# Altium PCB PCB_W-F-FC-HX2X_with_3D_Plastic.PcbDoc
Units mm, origin at the board's own origin, x right, y up, seen from the top; angles counter-clockwise.
Board outline 48.25 x 57.25 mm, 2 copper layers (Top Layer, Bottom Layer); 22 components, 14 nets, 61 pads, 0 vias.
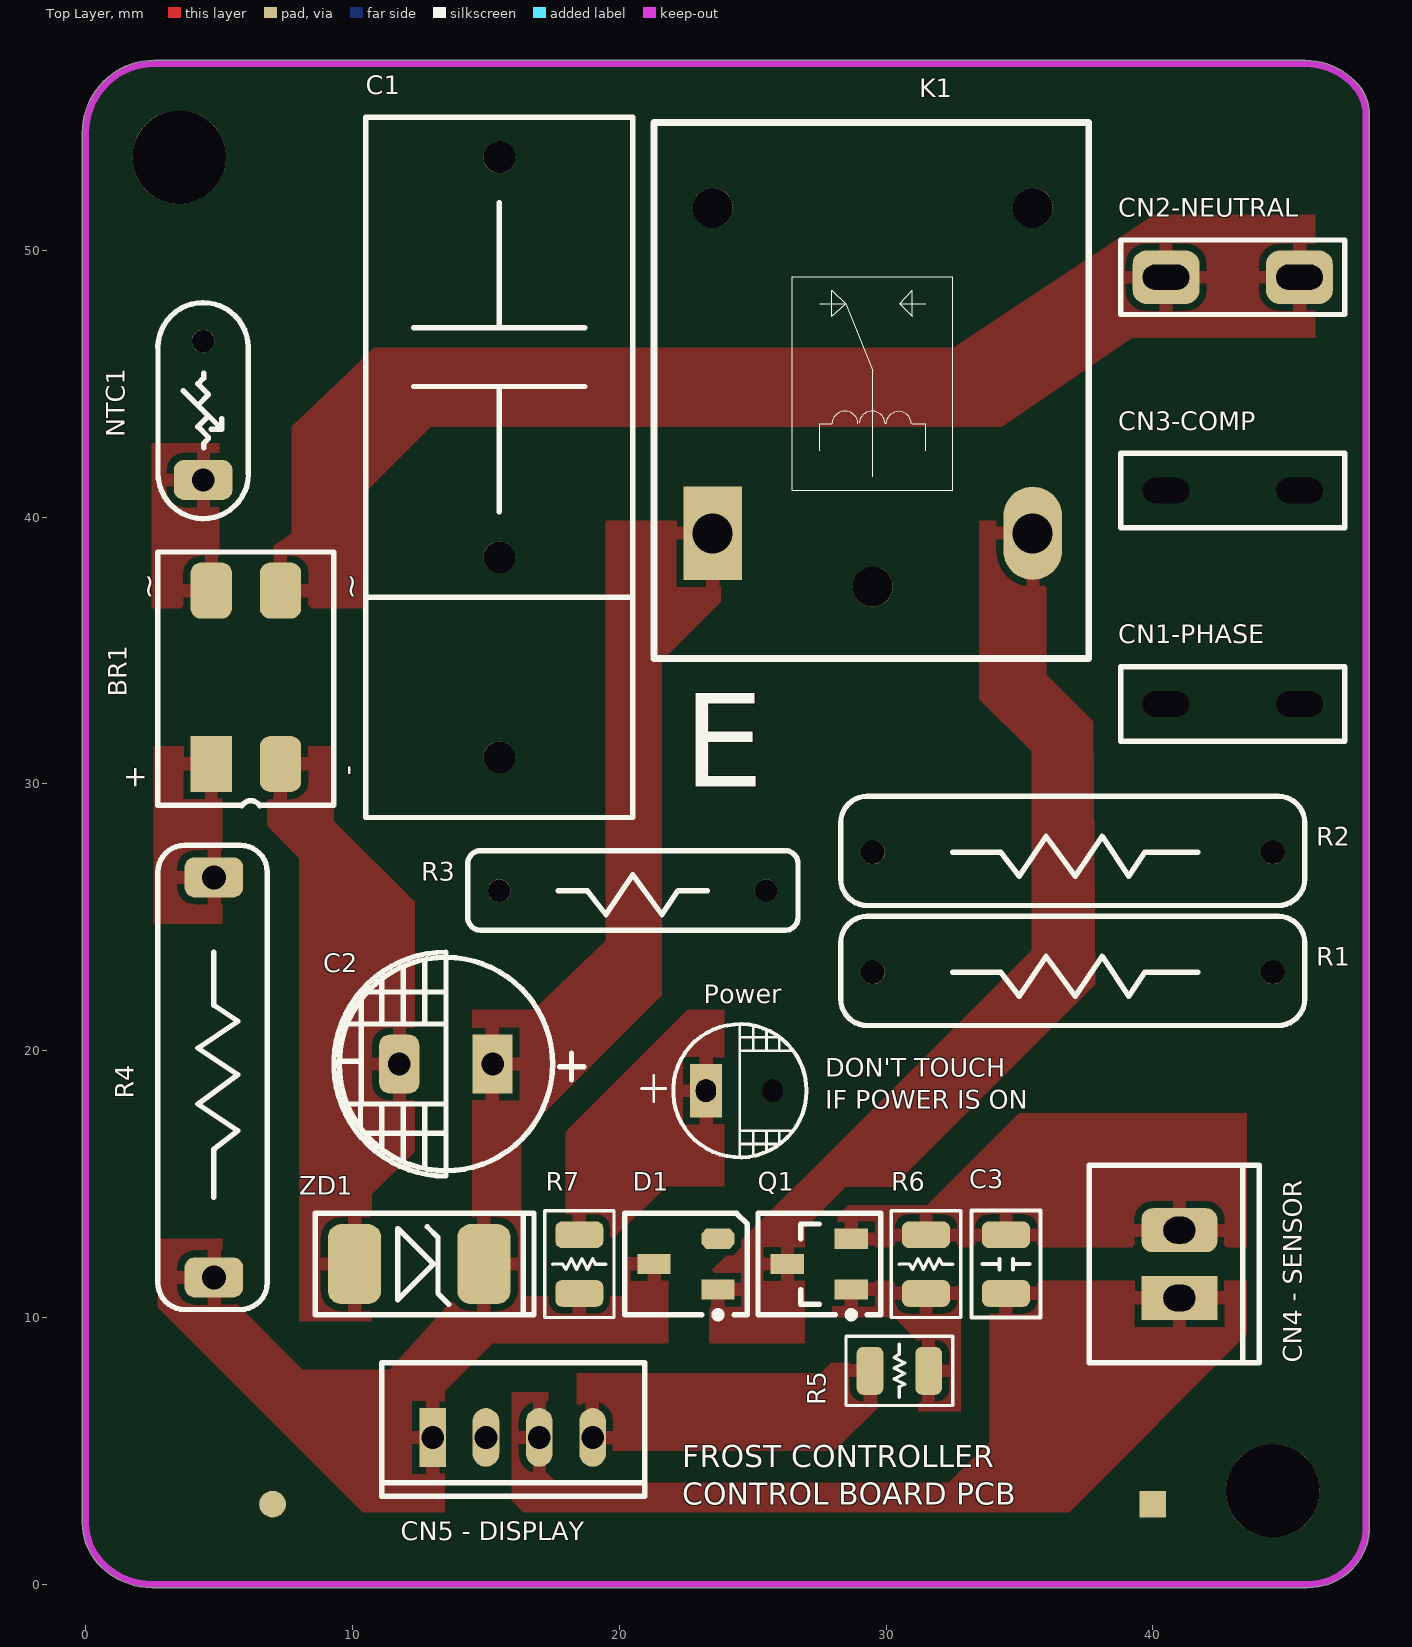
[diagram p0: Top Layer view]
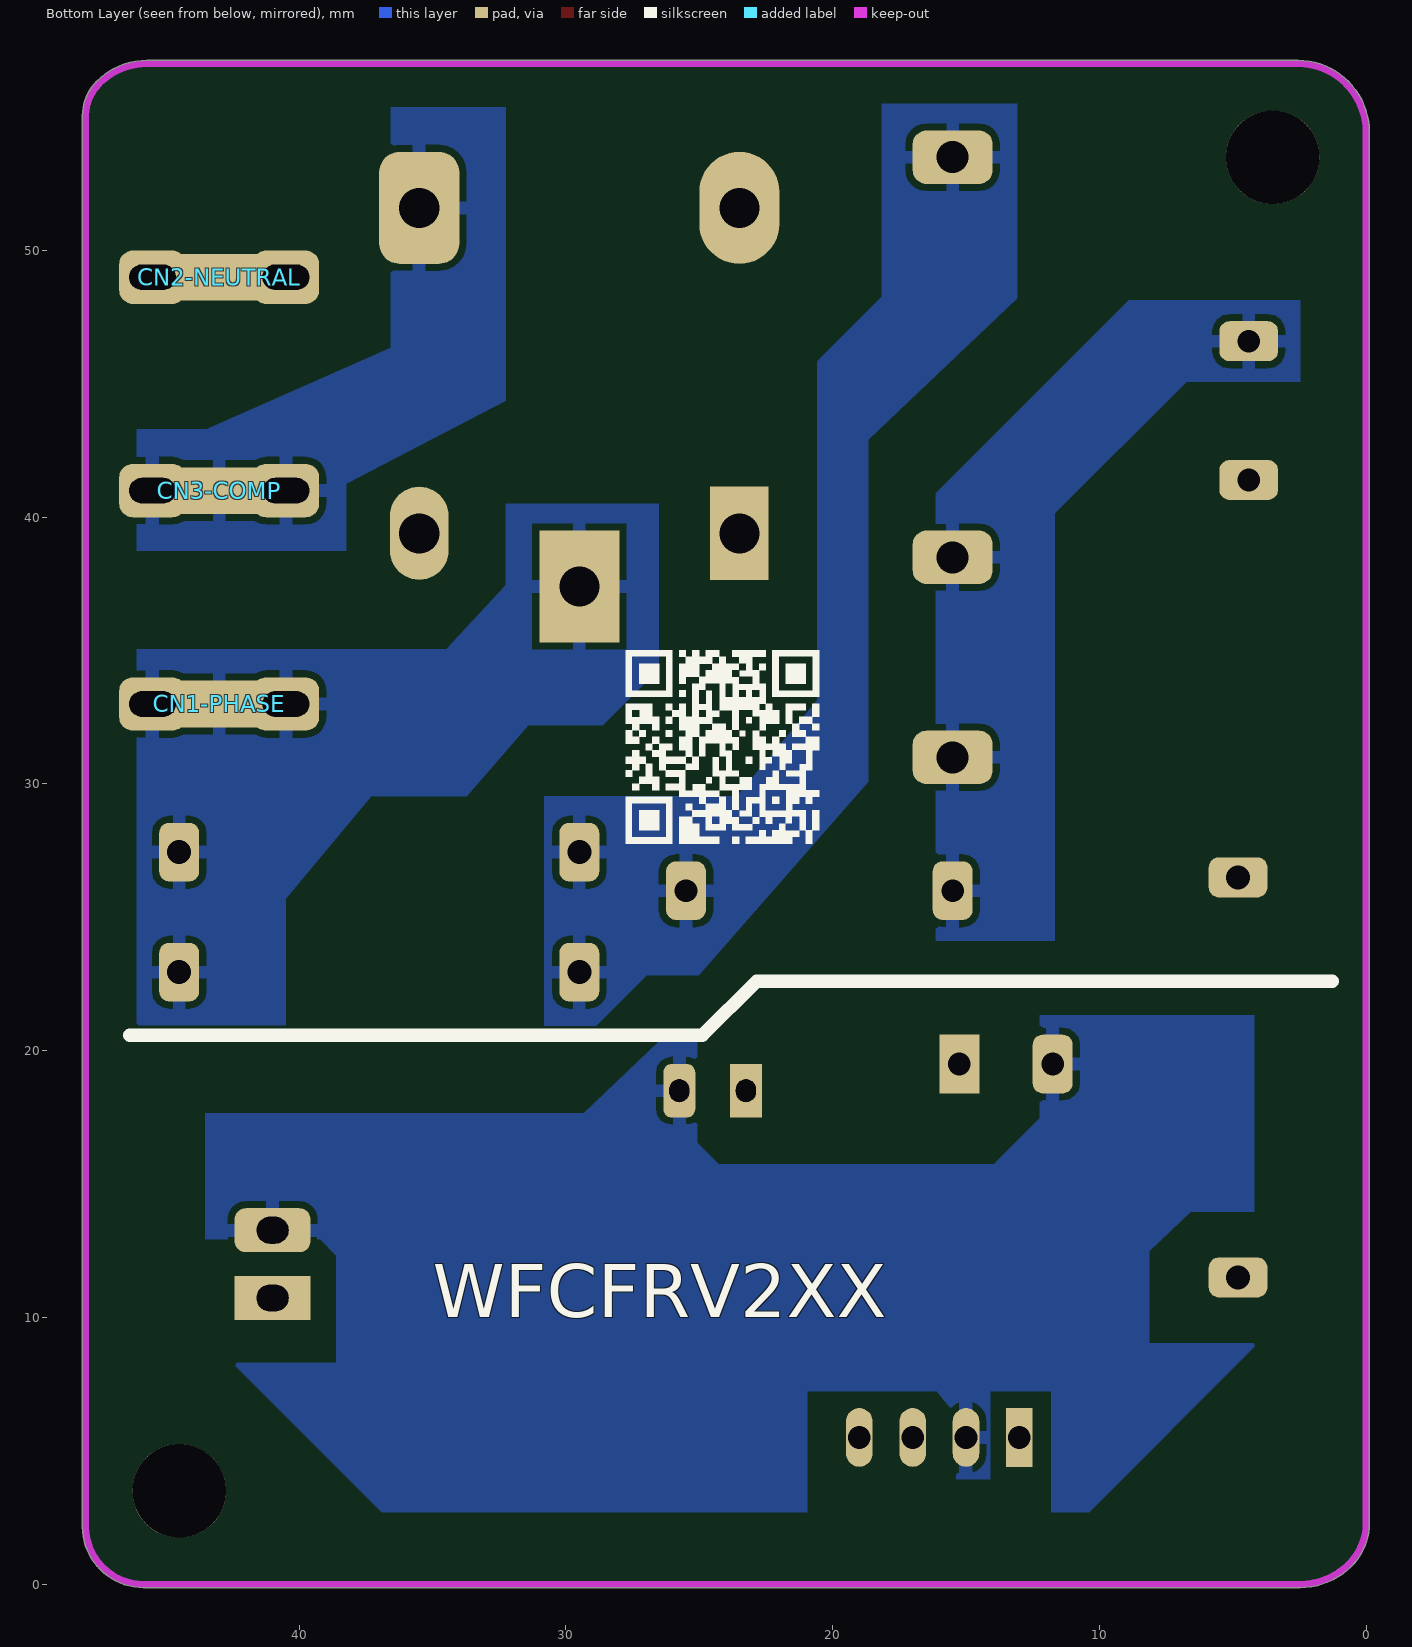
[diagram p1: Bottom Layer view, seen from below]
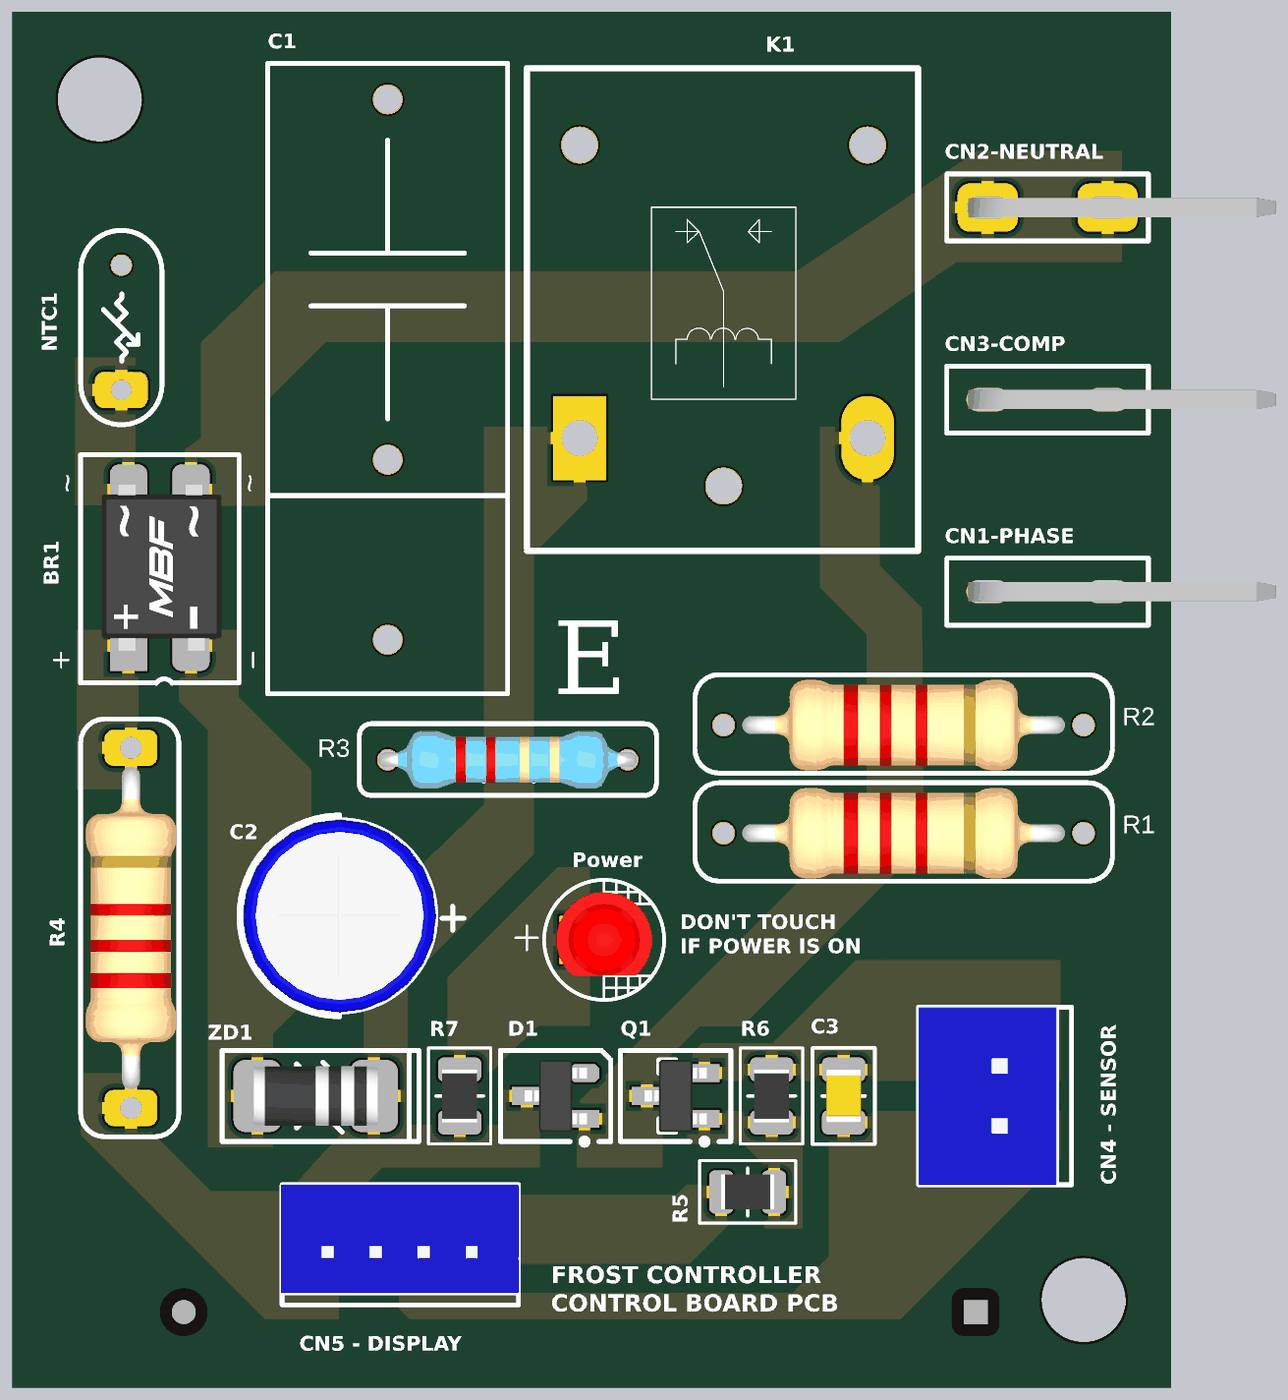
[diagram p2: 3D render of the assembled board from above, using the file's embedded part models]

## Layer stack, top to bottom
Top Solder: solder mask 0.0102, Solder Resist, Dk 3.5
Top Layer: signal copper 0.0356
Dielectric 1: dielectric 0.32, FR-4, Dk 4.8
Bottom Layer: signal copper 0.0356
Bottom Solder: solder mask 0.0102, Solder Resist, Dk 3.5

## Board outline
0.545,0.672 cw(c2.168,2.295) -0.127,2.295 -0.127,54.421 cw(c2.602,54.421) 0.672,56.351 cw(c2.546,54.477) 2.546,57.127 45.714,57.127 cw(c45.714,54.477) 47.588,56.351 cw(c46.286,55.049) 48.127,55.049 48.127,2.154 cw(c45.852,2.154) 47.461,0.545 cw(c45.838,2.168) 45.838,-0.127 2.475,-0.127 cw(c2.475,2.602)

## Design rules (kind name [scope] priority, off if disabled: settings)
Clearance [All] p1: gap=0.254 ignorepadtopadclearanceinfootprint=FALSE except(0: Arc-Hole Track-Hole SMDPad-Hole THPad-Hole Via-Hole Fill-Hole Poly-Hole Region-Hole Text-Hole)
HoleSize [All] p1: absolutevalues=TRUE maxlimit=5 minlimit=0.025 maxpercent=80.000 minpercent=20.000
PolygonConnect PolygonConnect_Power [(InNet('NetC2_1'))] p1: connectstyle=Direct reliefconductorwidth=0.254 reliefentries=4 polygonreliefangle="90 Angle" airgapwidth=0.254
PolygonConnect [All] p2: connectstyle=Relief reliefconductorwidth=0.5 reliefentries=4 polygonreliefangle="90 Angle" airgapwidth=0.254
RoutingLayers [All] p1: top layer_v5=FALSE bottom layer_v5=TRUE
RoutingVias [All] p1: holewidth=0.711 width=1.27 viastyle="Through Hole" minholewidth=0.711 minwidth=1.27 maxholewidth=3 maxwidth=4
SolderMaskExpansion [All] p1: expansion=0.102 istentingtop=FALSE
Width Width_Power_Line [(InNet('GND') AND InNet('VCC'))] p1: maxlimit=5 minlimit=0.4 preferedwidth=0.5
Width [All] p2: maxlimit=5 minlimit=0.254 preferedwidth=0.5
28 further rules are at their usual default settings.

## Components (designator, comment, footprint, x,y, rotation, side; value= is the part's Value field where it differs from the comment)
BR1 "MB6S" BR_SMD_MB6S 6,34 r270 top locked
C1 "MKP X2 .68uF" C_X2_18X10X15.8_P15 15.5,46 r270 top locked
C2 "220uF 25VDC 20%" C_RADIAL_P3.5 13.5,19.5 r180 top locked
C3 "0.1uF 16V 10%" C_0805 34.5,12 r270 top locked
CN1-PHASE "187 Series RA TAB" "CN_TAB TERMINAL 187 SERIES (RIGHT ANGLE)"#1 43,33 r0 top
CN2-NEUTRAL "187 Series RA TAB" "CN_TAB TERMINAL 187 SERIES (RIGHT ANGLE)"#2 43,49 r0 top
CN3-COMP "187 Series RA TAB" "CN_TAB TERMINAL 187 SERIES (RIGHT ANGLE)"#1 43,41 r0 top
"CN4 - SENSOR" "A2512WV-XP" CN_B2B-XH-A_WHITE 41,12 r180 top
"CN5 - DISPLAY" "A2001WV-XP" CN_4P_A2001WV-XP-180DEG 16,5.5 r90 top
D1 "If=200mA" D_SOT-23-3_200MA 22.5,12 r90 top locked
K1 "12VDC, 15A" K_15ARELAY_AZ943-1CH-12DE 29.5,44.5 r90 top locked
NTC1 "16D-7" NTC_5MMPITCH 4.4,44 r270 top locked
Power "RED, Vf=3.2V, 20mA" LED_3X5_P2.5 24.5,18.5 r0 top locked
Q1 "NPN 200mA" Q_SOT-23-3_NPN_BC847 27.5,12 r90 top locked
R1 "220Ω 2W 1%" R_AXIAL_P15#1 37,22.944 r180 top
R2 "220Ω 2W 1%" R_AXIAL_P15#1 37,27.444 r180 top
R3 "470KΩ 1/2W 1%" R_AXIAL_P10 20.5,26 r180 top locked
R4 "33Ω 1W 1%" R_AXIAL_P15#2 4.8,19 r270 top locked
R5 "1KΩ 1/8W 5%" R_0805 30.5,8 r0 top locked
R6 "47KΩ 1/8W 5%" R_0805 31.5,12 r90 top locked
R7 "4.7KΩ 1/8W 5%" R_0805 18.5,12 r90 top locked
ZD1 "12V 1W 5%" "ZD_ZM4742A LL-41" 12.5,12 r180 top locked

## Footprints (in the part's own frame and the unit in brackets; to place one, negate y for a bottom-side part, rotate by r counter-clockwise, add the part's x,y. Pads: shape width x height; smd on the part's side, far side on the other; paste and mask are expansions set on the pad)
BR_SMD_MB6S [mm]
  rrect50% 2.1x1.55 smd: 1(-3.25,-1.3) 2(-3.25,1.3) 4(3.25,1.3)
  rect 2.1x1.55 smd: 3(3.25,-1.3)
  silkscreen extent -4.7,-3.3 4.82,3.3, body extent -3.45,-2.42 3.45,2.58, height 1.45
C_0805 [mm]
  rrect50% 1x1.8 smd: 1(-1.1,0) 2(1.1,0)
  silkscreen extent -2,-1.3 2,1.3, body extent -1.1,-0.72 1.1,0.73, height 1
C_RADIAL_P3.5 [mm] "Ø8*11mm"
  rect 1.5x2.2 hole 0.85: 1(-1.75,0)
  rrect50% 1.5x2.2 hole 0.85: 2(1.75,0)
  silkscreen extent -5.18,-4.2 4.2,4.2, body extent -4.03,-4.03 4.03,4.03, height 12.03
C_X2_18X10X15.8_P15 [mm]
  round 1.2 / inner round 1.2 / far side rrect50% 2x3 hole 1.2: 1(-7.5,0) 2(7.5,0)
  silkscreen extent -9,-5 9,5, body extent -9,-5 9,5, height 15.8
CN_4P_A2001WV-XP-180DEG [mm] "Top Entry Header 1.25mm pitch 1X4pin  180° long"
  rect 2.2x1 hole 0.85: 1(0,3)
  oval 2.2x1 hole 0.85: 2(0,1) 3(0,-1) 4(0,-3)
  silkscreen extent -2.2,-4.95 2.8,4.9, body extent -1.7,-4.95 2.8,4.95, height 6
CN_B2B-XH-A_WHITE [mm]
  rect 2.85x1.65 hole 1.2 slot 1 at 90 deg: 1(0,1.27)
  rrect50% 2.85x1.65 hole 1.2 slot 1 at 90 deg: 2(0,-1.27)
  silkscreen extent -3,-3.7 3.38,3.7, body extent -2.37,-3.7 3.38,3.7, height 7
"CN_TAB TERMINAL 187 SERIES (RIGHT ANGLE)"#1 [mm]
  rrect50% 0x0 / inner rrect50% 2.5x2 / far side rrect50% 2.5x2 hole 0.95 slot 1.75 at 0 deg: 1(-2.5,0) 1(2.5,0)
  rect 2.85x1.75 smd far side: 1(0,0)
  silkscreen extent -4.2,-1.4 4.2,1.4, body extent -3.3,-0.4 9.5,0.4, height 9.3
"CN_TAB TERMINAL 187 SERIES (RIGHT ANGLE)"#2 [mm]
  rrect50% 2.5x2 hole 0.95 slot 1.75 at 0 deg: 1(-2.5,0) 1(2.5,0)
  rect 2.85x1.75 smd far side: 1(0,0)
  silkscreen extent -4.2,-1.4 4.2,1.4, body extent -3.3,-0.4 9.5,0.4, height 9.3
D_SOT-23-3_200MA [mm] "Diodes - General Purpose 100V 200mA 1.25V @ 200mA SOT-23(SOT-23-3) RoHS"
  oct 0.75x1.25 smd: 0(0.95,-1.2)
  rect 0.75x1.25 smd: 1(-0.95,-1.2) 2(0,1.2)
  silkscreen extent -2.02,-2.3 1.9,2.3, body extent -1.5,-1.3 1.5,1.3, height 1.15
K_15ARELAY_AZ943-1CH-12DE [mm]
  round 1.5 / inner round 1.5 / far side rect 4.2x3 hole 1.5: 1(-7.1,0)
  oval 3.5x2.2 hole 1.5: 2(-5.1,-6)
  round 1.5 / inner round 1.5 / far side rrect50% 4.2x3 hole 1.5: 3(7.1,-6)
  round 1.5 / inner round 1.5 / far side oval 4.2x3 hole 1.5: 4(7.1,6)
  rect 3.5x2.2 hole 1.5: 5(-5.1,6)
  silkscreen extent -9.8,-8.1 10.3,8.2, body extent -9.8,-8.1 10.3,8.2, height 15
LED_3X5_P2.5 [mm]
  rect 1.2x2 hole 0.85 slot 0.75 at 0 deg: 1(-1.25,0)
  rrect50% 0x0 / inner rrect50% 1.2x2 / far side rrect50% 1.2x2 hole 0.85 slot 0.75 at 0 deg: 2(1.25,0)
  silkscreen extent -3.67,-2.5 2.52,2.5, body extent -1.97,-1.5 2.01,1.99, height 7.38
NTC_5MMPITCH [mm]
  round 0.85 / inner round 0.85 / far side rrect50% 1.5x2.2 hole 0.85: 1(-2.6,0)
  rrect50% 1.5x2.2 hole 0.85: 2(2.6,0)
  silkscreen extent -4.05,-1.7 4.05,1.7, body extent -2.9,-1.64 2.9,1.69, height 6.75
Q_SOT-23-3_NPN_BC847 [mm] "SOT23, 3-Leads, Body 2.90x2.45mm, Pitch 0.95mm, IPC Medium Density"
  rect 0.75x1.25 smd: 1(-0.95,-1.2) 2(0.95,-1.2) 3(0,1.2)
  silkscreen extent -2.02,-2.3 1.9,2.3, body extent -1.5,-1.3 1.5,1.3, height 1.15
R_0805 [mm]
  rrect50% 1x1.8 smd: 1(-1.1,0) 2(1.1,0)
  silkscreen extent -2,-1.3 2,1.3, body extent -1.1,-0.72 1.1,0.73, height 0.65
R_AXIAL_P10 [mm] "Resistors 7mm Length"
  round 0.85 / inner round 0.85 / far side rrect50% 1.5x2.2 hole 0.85: 1(-5,0) 2(5,0)
  silkscreen extent -6.2,-1.5 6.18,1.48, body extent -5.38,-1.2 5.38,1.2, height 2.41
R_AXIAL_P15#1 [mm] "Resistors 12mm Length"
  round 0.9 / inner round 0.9 / far side rrect50% 1.5x2.2 hole 0.9: 1(-7.5,0) 2(7.5,0)
  silkscreen extent -8.7,-2.1 8.7,2, body extent -6.72,-1.87 6.73,1.88, height 5.87
R_AXIAL_P15#2 [mm] "Resistors 12mm Length"
  rrect50% 1.5x2.2 hole 0.9: 1(-7.5,0) 2(7.5,0)
  silkscreen extent -8.7,-2.1 8.7,2, body extent -6.72,-1.87 6.73,1.88, height 5.87
"ZD_ZM4742A LL-41" [mm]
  rrect50% 2x3 smd: 1(-2.425,0) 2(2.425,0)
  silkscreen extent -4.3,-1.9 3.9,1.9, body extent -2.57,-1.23 2.58,1.23, height 2.46

## Part data
BR1: library part "Bridge Rectifier", "BRIDGE RECT 1P 600V 500MA 4SOIC, ON-SEMICONDUCTOR"
C1: library part "Capacitor Non-Polar", "684K310V P=15 18*9.5*15.5 Climate-category: 40/110/56"
C2: library part "Capacitor Polar", "Ø8*11mm 3.5mm Pitch"
C3: library part "Capacitor Non-Polar", "0805 Multilayer Ceramic Capacitors"
CN1-PHASE CN2-NEUTRAL CN3-COMP: library part Connector_1PIN, "4.8mm TAB, 0.8mm thickness"
"CN4 - SENSOR": library part Connector_2PINs, "2Pins, 2.5mmPitch, 180° Wafer, White ; DIP"
"CN5 - DISPLAY": library part Connector_4PINs, "4Pins, 2mmPitch, 180° Wafer, White ; DIP"
D1: library part Diode, "BAS19, SOT-23-3"
K1: library part Relay, "Zettler AZ943–1CH–12DE"
NTC1: library part Thermistor, "5mm Pitch"
Power: library part LED, "F3*5mm, 2.5mm Pitch"
Q1: library part BJT_npn, "BC847, SOT-23-3"
R1 R2: library part Resistor, "Metal Oxide Film Resistor, Through Hole Axial, L=12, øD=5, H=28, ød=0.6, Flame Proof"
R3: library part Resistor, "Metal Oxide Film Resistor, Through Hole Axial, L=7, øD=2.5, H=28, ød=0.48, Flame Proof"
R4: library part Resistor, "Metal Oxide Film Resistor, Through Hole Axial, L=10, øD=4, H=28, ød=0.5, Flame Proof"
R5 R6 R7: library part Resistor, "0805 Thick Film SMD Resistor"
ZD1: library part "Zener Diode", "DO-213AB (glass)  (ZM4742A LL-41)"

## Free pads (board coordinates)
  round 3.5 hole 3.5 unplated: 0(3.5,53.5) 0(44.5,3.5)
  round 1 smd mask+0.5: 0(7,3)
  rect 1x1 smd mask+0.5: 0(40,3)
  round 1.2 / inner rrect50% 3x2 / far side rrect50% 3x2 hole 1.2: 2(15.5,31)

## Nets (pads, with @x,y where several pads share a name; then routed paths per layer and width w, separated by ;. In a path a pad name is that pad's centre, name@x,y a point inside that pad or via, vN(x,y) a via of type N, cw(c..) or ccw(c..) an arc to the next point about the centre after c; other vN are vias at no path point)
+12V: "CN5 - DISPLAY.1" C2.1 D1.2 K1.5 R4.2 R7.1 ZD1.1
_MOTOR: "CN5 - DISPLAY.4" R5.1
AC_L: CN1-PHASE.1 K1.1 R1.1 R2.1
AC_M: CN3-COMP.1 K1.3
AC_N: BR1.2 CN2-NEUTRAL.1
GND: "CN4 - SENSOR.2" "CN5 - DISPLAY.2" BR1.4 C2.2 C3.1 Power.2 Q1.2 R6.2 ZD1.2
NetBR1_1: BR1.1 NTC1.2
NetBR1_3: BR1.3 R4.1
NetC1_1: C1.1 R1.2 R2.2 R3.1
NetC1_2: C1.2 NTC1.1 pad.2 R3.2
NetD1_1: D1.1 K1.2 Q1.3
NetPower_1: Power.1 R7.2
NetQ1_1: Q1.1 R5.2 R6.1
SEN: "CN4 - SENSOR.1" "CN5 - DISPLAY.3" C3.2
pads on no net: D1.0 K1.4

## Polygon pours and split planes (outlines as drawn)
GND on Bottom Layer "Bottom Layer-GND" (solid, remove dead copper, pour order 40): 4.191,21.336 12.229,21.336 12.229,17.471 13.952,15.748 24.268,15.748 25.068,16.548 25.068,20.365 26.492,20.365 29.333,17.653 43.532,17.653 43.532,12.925 39.214,12.925 38.608,12.319 38.608,8.3 42.512,8.3 36.912,2.7 20.955,2.7 20.955,7.239 16.106,7.239 15.367,6.338 15.367,3.937 14.097,3.937 14.097,7.239 11.811,7.239 11.811,2.7 10.381,2.7 4.052,9.029 8.128,9.029 8.128,12.482 6.577,13.97 4.191,13.97
NetC1_2 on Bottom Layer "Bottom Layer-NetC1_2" (solid, remove dead copper, pour order 22): 2.475,45.089 6.727,45.089 11.669,40.147 11.669,24.13 16.129,24.13 16.129,40.894 8.89,48.133 2.475,48.133
NetC1_1 on Bottom Layer "Bottom Layer-NetC1_1" (solid, remove dead copper, pour order 20): 18.669,30.082 25.016,22.827 26.974,22.827 28.857,20.944 30.814,20.944 30.814,24.13 30.814,29.544 23.588,29.544 20.574,33.131 20.574,45.847 18.161,48.26 18.161,55.499 13.081,55.499 13.081,48.209 18.669,42.901
AC_L on Bottom Layer "Bottom Layer-AC_L" (solid, remove dead copper, pour order 18): 46.101,35.052 34.48,35.052 32.258,37.443 32.258,40.513 26.516,40.513 26.516,34.303 28.622,32.197 31.406,32.197 33.722,29.544 37.308,29.544 40.5,25.705 40.5,20.964 46.101,20.948
AC_M on Bottom Layer "Bottom Layer-AC_M" (solid, remove dead copper, pour order 16): 46.101,43.307 43.493,43.307 36.576,46.357 36.576,55.372 32.258,55.372 32.258,44.369 38.236,41.248 38.236,38.75 46.101,38.75
no net on Bottom Layer "Bottom Layer-No Net" (solid, pour order 14): 12.065,25.3
SEN on Top Layer "Top Layer-_SEN" (solid, remove dead copper, pour order 46): 17.336,7.2 17.336,4.127 17.653,3.81 32.357,3.81 33.888,5.341 33.888,10.288 34.971,11.371 40.318,11.371 43.532,11.371 43.532,9.369 36.863,2.7 16.4,2.7 15.963,3.137 15.963,7.2
NetQ1_1 on Top Layer "Top Layer-NetQ1_1" (solid, remove dead copper, pour order 44): 27.985,11.371 32.8,11.371 32.8,6.473 31.2,6.473 31.2,9.1 30.3,10 28.2,10 27.985,10.215
_MOTOR on Top Layer "Top Layer-_MOTOR" (solid, remove dead copper, pour order 42): 18.4,7.9 27.55,7.9 27.95,8.3 29.684,8.3 29.684,6.621 28.063,5 18.4,5
GND on Top Layer "Top Layer-GND" (solid, remove dead copper, pour order 38): 28.2,13.796 28.587,14.211 31.55,14.211 34.992,17.653 43.532,17.653 43.532,12.629 39.553,12.629 28.2,12.629
NetD1_1 on Top Layer "Top Layer-NetD1_1" (solid, remove dead copper, pour order 36): 23.369,9.029 23.369,11.675 28.662,16.968 35.456,23.762 35.456,31.221 33.504,33.173 33.504,39.878 36,39.878 36,34.1 37.765,32.335 37.841,22.484 30.252,14.895 28.495,14.895 26.951,13.351 26.951,9.029
NetPower_1 on Top Layer "Top Layer-NetPower_1" (solid, remove dead copper, pour order 34): 18,13 18,16.97 22.563,21.533 23.932,21.533 23.932,14.918 21.773,14.918 19.811,13
+12V on Top Layer "Top Layer-+12V" (solid, remove dead copper, pour order 32): 14.484,21.533 16.798,21.533 19.5,24.121 19.5,39.878 23.813,39.878 23.813,36.826 21.6,34.613 21.6,22.078 16.327,16.805 16.327,10.803 20.2,10.803 20.2,12.253 21.84,12.253 21.84,9.029 19.842,9.029 15.257,9.029 13.462,7.234 13.462,2.7 10.381,2.7 5.038,8.043 2.7,10.381 2.7,10.965 2.7,12.956 5.12,12.956 5.12,11.042 8.116,8.046 11.386,8.047 14.484,11.469
GND on Top Layer "Top Layer-GND 1" (solid, remove dead copper, pour order 30): 6.8,31.412 6.8,28.425 8.001,27.224 8.001,9.859 10.727,9.859 10.727,14.611 12.327,16.211 12.327,21.356 12.327,25.578 9.3,28.605 9.3,31.413
NetBR1_3 on Top Layer "Top Layer-NetBR1_3" (solid, remove dead copper, pour order 28): 2.546,31.413 5.12,31.412 5.12,29.321 5.12,24.765 2.546,24.765
NetBR1_1 on Top Layer "Top Layer-NetBR1_1" (solid, remove dead copper, pour order 26): 4.993,36.584 4.993,42.768 2.475,42.768 2.475,36.591
AC_N on Top Layer "Top Layer-AC_N" (solid, remove dead copper, pour order 24): 39.224,46.736 46.101,46.736 46.101,51.35 40.055,51.35 32.523,46.349 10.807,46.349 7.723,43.396 7.723,39.4 7.039,38.93 7.039,36.584 10.414,36.584 10.414,40.886 12.924,43.396 34.337,43.396

## Keep-outs
Keep-Out Layer:
  lines w0.254: 44.577,0 45.838,0 ccw(c45.838,2.168) 47.371,0.635 ccw(c45.852,2.154) 48,2.154 48,3 48,54 48,55.049 ccw(c46.286,55.049) 47.498,56.261 ccw(c45.714,54.477) 45.714,57 45,57 3,57 2.546,57 ccw(c2.546,54.477) 0.762,56.261 ccw(c2.602,54.421) 0,54.421 0,54 0,3 0,2.295 ccw(c2.168,2.295) 0.635,0.762 ccw(c2.475,2.602) 2.475,0 3,0 45,0

## Other copper
Top Layer:
  region: 35.45,30.422
  region: 35.45,30.422
  region: 35.45,30.422
  region: 35.45,30.422

## Silkscreen, mask and mechanical layers (free items; w line width, h text height)
Top Overlay:
  lines w0.2: 10.5,37 10.5,28.745 20.5,28.745 20.5,37
  text "E" at 22.396,28.745 h6
  text "DON'T TOUCH / IF POWER IS ON" at 27.723,17.584 h1.2
  text "FROST CONTROLLER / CONTROL BOARD PCB" at 22.352,2.7 h1.4
Bottom Overlay:
  drawing of 27 lines, arcs and shapes, not listed
  text "WFCFRV2XX" at 35,10 h2

## Text inside footprints (layer, text, board x,y; h text height)
BR1: Top Overlay "~" at 9.3,37.9 h1.5 r270; Top Overlay "~" at 1.7,37.9 h1.5 r270; Top Overlay "-" at 10.2,30.7 h0.8 r90; Top Overlay "+" at 2.2,30.7 h0.8 r90